# Altium PCB Moo1.1_Ant.PcbDoc
Units mil, origin at the board's own origin, x right, y up, seen from the top; angles counter-clockwise.
Board outline 1229 x 5810 mil, 4 copper layers (Top Layer, GND_Plane, Signal_Layer, Bottom Layer), stack 28.2 mil thick; 69 components, 77 nets, 286 pads, 55 vias.
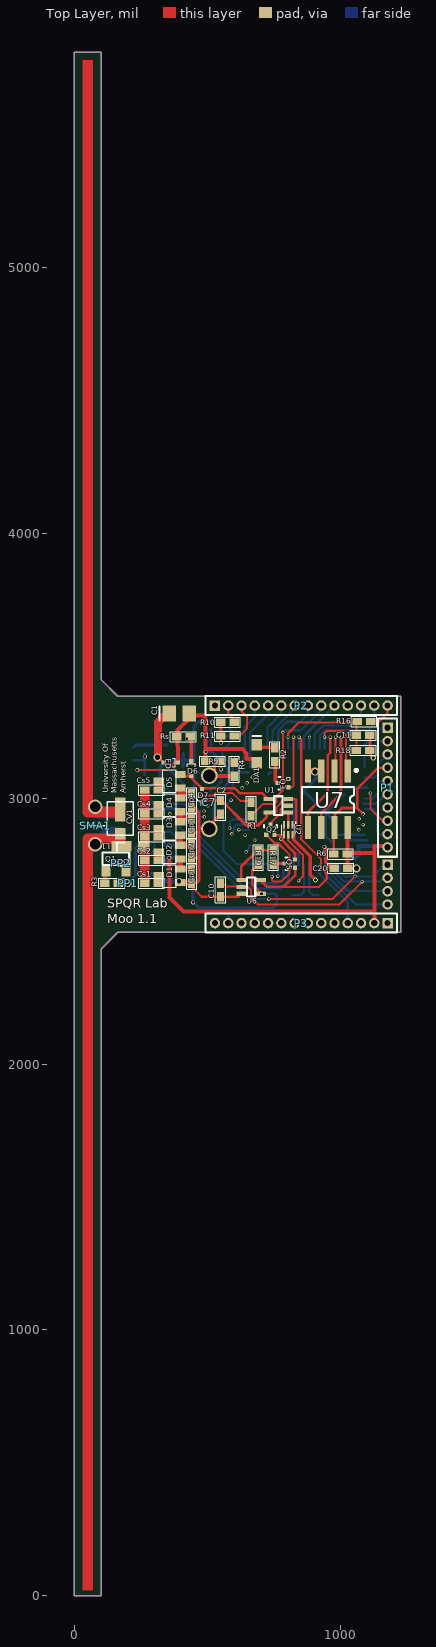
[diagram p0: Top Layer view]
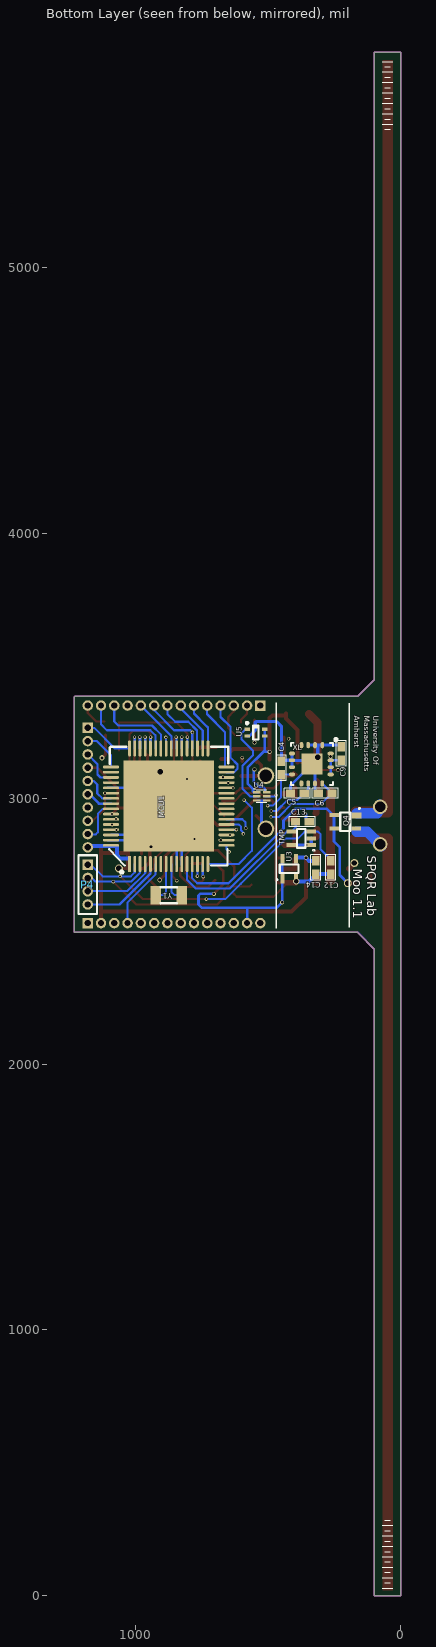
[diagram p1: Bottom Layer view, seen from below]
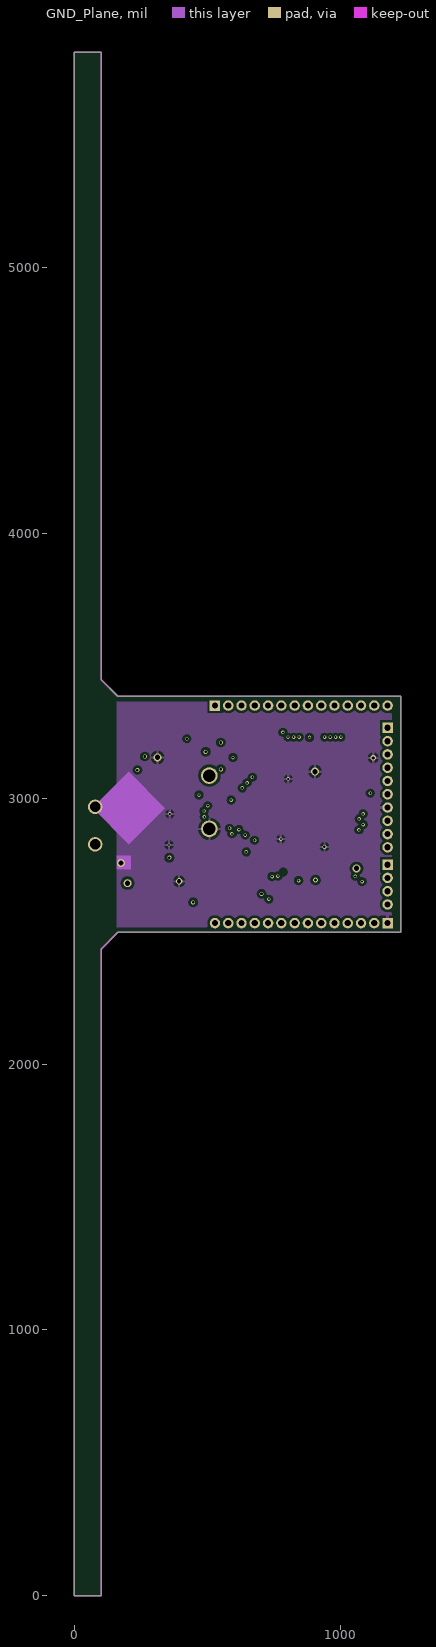
[diagram p2: GND_Plane]
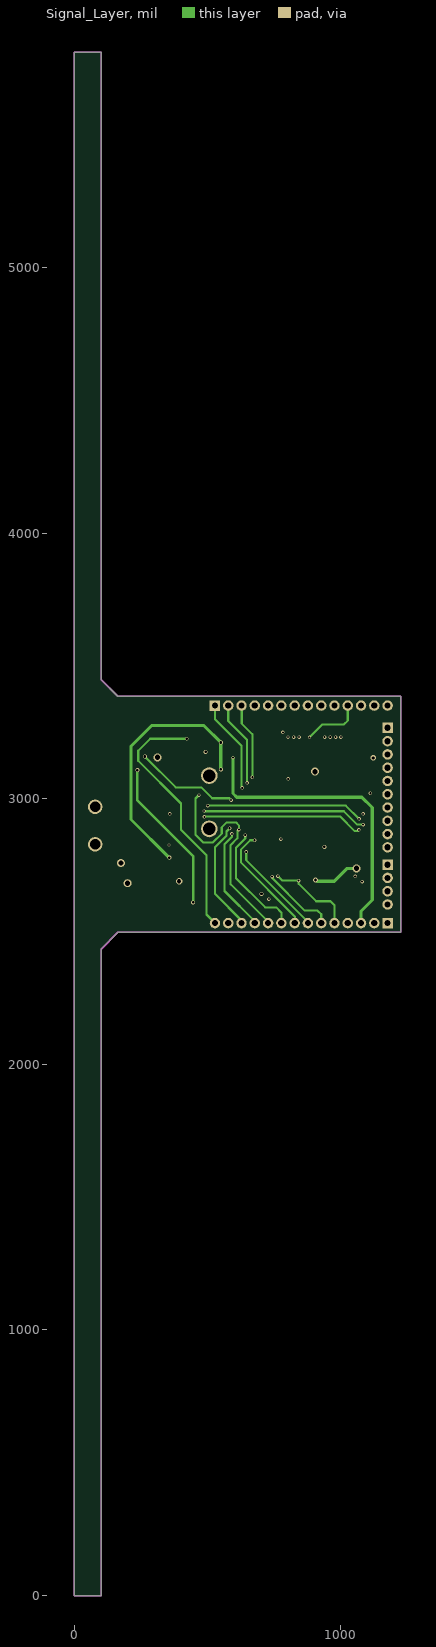
[diagram p3: Signal_Layer]

## Layer stack, top to bottom
Top Layer: signal copper 1.4
Dielectric: prepreg 8.8, FR-4, Dk 4.8
GND_Plane: signal copper 1.4
Dielectric: core 5, FR-4, Dk 4.8
Signal_Layer: signal copper 1.4
Dielectric: prepreg 8.8, FR-4, Dk 4.8
Bottom Layer: signal copper 1.4

## Board outline
0,0 100,0 100,2434 163,2497 1229,2497 1229,3384 1227,3386 163,3386 100,3449 100,5810 0,5810

## Design rules (kind name [scope] priority, off if disabled: settings)
Clearance Clearance_Inner [(OnLayer('GND_Plane') OR OnLayer('Signal_Layer'))] p1: gap=10
Clearance Clearance_Outer [(OnLayer('Bottom Layer') OR OnLayer('Top Layer'))] p2: gap=7
Clearance Clearance_Via_Inner [isVia vs (OnLayer('GND_Plane') OR OnLayer('Signal_Layer'))] p3: gap=10
Clearance Clearance_Via_Outer [isVia vs (OnLayer('Bottom Layer') OR OnLayer('Top Layer'))] p4: gap=7
Clearance Clearance_Via_Via [isVia or isPad vs isVia or isPad] p5: gap=7
Clearance Clearance_Default [All] p6: gap=10
PolygonConnect [All] p1: connectstyle=Relief reliefconductorwidth=10 reliefentries=4 polygonreliefangle="90 Angle"
RoomDefinition Moo_Top [InComponentClass('Moo_Top')] p1: confinementstyle=ConfineIn formatcopy=TRUE lockcomponents=FALSE outline -79,-567 1305,-567 1305,5873 -79,5873
RoomDefinition Sensors [InComponentClass('Sensors')] p2: confinementstyle=ConfineIn formatcopy=TRUE lockcomponents=FALSE outline 1461,2263 -277,2263 -277,3575 1461,3575
RoomDefinition Digital_1 [InComponentClass('Digital_1')] p3: confinementstyle=ConfineIn formatcopy=TRUE lockcomponents=FALSE outline 1575,2186 -416,2186 -416,3668 1575,3668
RoomDefinition AFE [InComponentClass('AFE')] p4: confinementstyle=ConfineIn formatcopy=TRUE lockcomponents=FALSE outline 1396,2385 -142,2385 -142,3509 1396,3509
RoutingVias [All] p1: holewidth=28 width=50 viastyle="Through Hole" minholewidth=28 minwidth=50 maxholewidth=28 maxwidth=50
SilkscreenOverComponentPads [All] p1: minsilkscreentomaskgap=10
SolderMaskExpansion [All] p1: expansion=4
TestPointUsage [All] p1: valid=0 allowmultiple=FALSE
Testpoint [All] p1: side=15 testpointundercomponent=TRUE minsize=40 maxsize=100 preferedsize=60 minholesize=0 maxholesize=40 preferedholesize=32 testpointgrid=1 style=1023 order=0-112345678
Width [All] p1: maxlimit=78 minlimit=5 preferedwidth=8 toplayer_minwidth=6 midlayer1_minwidth=6 midlayer2_minwidth=6 midlayer2_maxwidth=40 bottomlayer_minwidth=6 bottomlayer_maxwidth=40 minimp=50.000000 maximp=50.000000 favimp=50.000000
23 further rules are at their usual default settings.

## Classes and differential pairs
component class Digital_1: C7 C14 C20 MCU1 P1 P2 P3 P4 R1 R4 R5 R6 R10 R11 R12 U3 U4 U5 U7 Y1
component class AFE: C1 C2 Cp1 Cp2 Cp3 Cp4 Cs1 Cs2 Cs3 Cs4 Cs5 CV1 D1 D2 D3 D4 D5 D6 D7 ED L1 PP1 PP2 Q1 Q2 Q4 R3 Rs U1 U2
component class Sensors: C4 C5 C6 C9 C10 C11 C12 C13 DA1 Q3 Q5 R2 R12 R16 R17 R18 R19 TMP U6 U? XL
component class Moo_Top: SMA1

## Components (designator, comment, footprint, x,y, rotation, side; value= is the part's Value field where it differs from the comment)
C1 "Ceramic_Chip_Capacitor" 0805 395,3321 r0 top
C2 "Ceramic_Chip_Capacitor" 0402 550,2968 r270 top
C4 "Ceramic_Chip_Capacitor" 0402 450,3116 r270 bottom
C5 "Ceramic_Chip_Capacitor" 0402 390,3021 r180 bottom
C6 "Ceramic_Chip_Capacitor" 0402 285,3021 r0 bottom
C7 "MaxCap LX 0.1F" "MAXCAP LX 0.1F" 508,2987 r270 top locked
C9 "Ceramic_Chip_Capacitor" 0402 224,3170 r270 bottom
C10 "Ceramic_Chip_Capacitor" 0402 550,2657 r270 top
C11 "Ceramic_Chip_Capacitor" 0402 1087,3239 r0 top
C12 "Ceramic_Chip_Capacitor" 0402 264,2741 r90 bottom
C13 "Ceramic_Chip_Capacitor" 0402 371,2914 r0 bottom
C14 "Ceramic_Chip_Capacitor" 0402 320,2741 r90 bottom
C20 "Ceramic_Chip_Capacitor" 0402 1003,2738 r180 top
Cp1 "Ceramic_Chip_Capacitor" 0402 441,2708 r270 top
Cp2 "Ceramic_Chip_Capacitor" 0402 441,2803 r270 top
Cp3 "Ceramic_Chip_Capacitor" 0402 441,2898 r270 top
Cp4 "Ceramic_Chip_Capacitor" 0402 441,2993 r270 top
Cs1 "Ceramic_Chip_Capacitor" 0402 290,2682 r0 top
Cs2 "Ceramic_Chip_Capacitor" 0402 290,2768 r0 top
Cs3 "Ceramic_Chip_Capacitor" 0402 290,2857 r0 top
Cs4 "Ceramic_Chip_Capacitor" 0402 290,2944 r0 top
Cs5 "Ceramic_Chip_Capacitor" 0402 290,3033 r0 top
CV1 "Var Cap" VAR-CAP_603 173,2926 r90 top
D1 "HSMS-285C" "SOT-323, HSMS-285C" 358,2710 r90 top
D2 "HSMS-285C" "SOT-323, HSMS-285C" 358,2799 r90 top
D3 "HSMS-285C" "SOT-323, HSMS-285C" 358,2888 r90 top
D4 "HSMS-285C" "SOT-323, HSMS-285C" 358,2977 r90 top
D5 "HSMS-285C" "SOT-323, HSMS-285C" 358,3066 r90 top
D6 "RB751S40T1" SOD-523 440,3141.12 r0 top
D7 "RB751S40T1" SOD-523 480,2982 r180 top
DA1 "SML-311UTT86" LED-0603 687,3170 r270 top
ED "ESD5Z3.3T1" SOD-523 390,3136 r270 top
L1 "Inductor" 0603 227,2821 r0 top
MCU1 "MSP430F261x" 64-PM 874,2972 r90 bottom
P1 "MHDR1X10" MHDR1X10 1179,3267 r270 top
P2 "MHDR1X14" MHDR1X14#1 529,3351 r0 top
P3 "MHDR1X14" MHDR1X14#2 529,2532 r0 top
P4 "MHDR1X4" MHDR1X4 1179,2752 r270 bottom
PP1 "Probe Point" "PROBE POINT" 200,2682 r90 top
PP2 "Probe Point" "Probe Point" 175,2758 r0 top
Q1 "BFT25A" SOT-23 156,2774 r0 top
Q2 "NTK3134N" SOT723 738,2884 r90 top
Q3 "NTK3134N" SOT723 785,3059 r180 top
Q4 "BF1212WR" SOT343R 207,2914 r90 bottom
Q5 "NTK3134N" SOT723 811,2756 r180 top
R1 "Thick Film Chip Resistor" 0402 665,2961 r270 top
R2 "Thick Film Chip Resistor" 0402 754,3166 r270 top
R3 "Thick Film Chip Resistor" 0402 140,2682 r0 top
R4 "Thick Film Chip Resistor" 0402 602,3111 r90 top
R5 "Thick Film Chip Resistor" 0402 520,3141 r180 top
R6 "Thick Film Chip Resistor" 0402 1002,2792 r180 top
R10 "Thick Film Chip Resistor" 0402 576,3288 r0 top
R11 "Thick Film Chip Resistor" 0402 576,3236 r0 top
R16 "Thick Film Chip Resistor" 0402 1090,3291 r180 top
R17 "Thick Film Chip Resistor" 0402 748,2779 r270 top
R18 "Thick Film Chip Resistor" 0402 1087,3182 r0 top
R19 "Thick Film Chip Resistor" 0402 692,2779 r90 top
Rs "Thick Film Chip Resistor" 0402 410,3233 r0 top
SMA1 "SMA Port" "SMA Port" 78,2899 r180 top
TMP "LM94021" SC70 375,2851 r90 bottom
U1 "NCS2200SQ2T2G" sc70-5 768,2974 r90 top
U2 "NLSV1T244" UDFN6 805,2883 r180 top
U3 "NCP583" SC82-AB 394,2732 r180 bottom
U4 "NLSV1T244" UDFN6 524,3009 r270 bottom
U5 "S-1000C20-I4T1G" SNT-4A 579,3262 r180 bottom
U6 "TS5A3166" sc70-5 665,2668 r270 top
U7 "SST25WF040" SOIC8 954,2997 r270 top
XL "ADXL330" 16-QFN 335,3131 r270 bottom
Y1 "FC-135" FC-135 874,2637 r0 bottom

## Footprints (in the part's own frame and the unit in brackets; to place one, negate y for a bottom-side part, rotate by r counter-clockwise, add the part's x,y. Pads: shape width x height; smd on the part's side, far side on the other; paste and mask are expansions set on the pad)
16-QFN [mm] "16-QFN, LFCSP (CP-16-5) for ADXL330k"
  rect 2x2 smd: 0(0,0)
  oval 0.6x0.35 smd: 1(-1.8,1) 2(-1.8,0.3) 3(-1.8,-0.35) 4(-1.8,-1) 9(1.867,-1) 10(1.867,-0.35) 11(1.867,0.3) 12(1.867,1)
  oval 0.35x0.6 smd: 5(-1,-1.9) 6(-0.35,-1.9) 7(0.3,-1.9) 8(1,-1.9) 13(1,1.8) 14(0.3,1.8) 15(-0.35,1.8) 16(-1,1.8)
  silkscreen extent -2.45,-2 2,2.42
64-PM [mm] "S-PQFP, 64-Leads, Body 12.2x12.2mm (max), Pitch 0.50mm, IPC Low Density - MSP430x261x"
  rect 8.7x8.7 smd: 0(0,0)
  rect 1.55x0.25 smd: 1(-5.525,3.75)
  oval 1.55x0.25 smd: 2(-5.525,3.25) 3(-5.525,2.75) 4(-5.525,2.25) 5(-5.525,1.75) 6(-5.525,1.25) 7(-5.525,0.75) 8(-5.525,0.25) 9(-5.525,-0.25) 10(-5.525,-0.75) 11(-5.525,-1.25) 12(-5.525,-1.75) 13(-5.525,-2.25) 14(-5.525,-2.75) 15(-5.525,-3.25) 16(-5.525,-3.75) 33(5.525,-3.75) 34(5.525,-3.25) 35(5.525,-2.75) 36(5.525,-2.25) 37(5.525,-1.75) 38(5.525,-1.25) 39(5.525,-0.75) 40(5.525,-0.25) 41(5.525,0.25) 42(5.525,0.75) 43(5.525,1.25) 44(5.525,1.75) 45(5.525,2.25) 46(5.525,2.75) 47(5.525,3.25) 48(5.525,3.75)
  oval 0.25x1.55 smd: 17(-3.75,-5.525) 18(-3.25,-5.525) 19(-2.75,-5.525) 20(-2.25,-5.525) 21(-1.75,-5.525) 22(-1.25,-5.525) 23(-0.75,-5.525) 24(-0.25,-5.525) 25(0.25,-5.525) 26(0.75,-5.525) 27(1.25,-5.525) 28(1.75,-5.525) 29(2.25,-5.525) 30(2.75,-5.525) 31(3.25,-5.525) 32(3.75,-5.525) 49(3.75,5.525) 50(3.25,5.525) 51(2.75,5.525) 52(2.25,5.525) 53(1.75,5.525) 54(1.25,5.525) 55(0.75,5.525) 56(0.25,5.525) 57(-0.25,5.525) 58(-0.75,5.525) 59(-1.25,5.525) 60(-1.75,5.525) 61(-2.25,5.525) 62(-2.75,5.525) 63(-3.25,5.525) 64(-3.75,5.525)
  silkscreen extent -6.42,-5.69 5.69,5.69
0402 [mm] "Chip Capacitor; Body 1.0 x 0.5 mm (LxW typ)"
  rect 0.9x0.7 smd: 1(-0.65,0) 2(0.65,0)
  silkscreen extent -1.23,-0.48 1.23,0.48
0603 [mm] "Chip Capacitor; Body 1.6 x 0.8 mm (LxW typ)"
  rect 1.1x1 smd: 1(-0.85,0) 2(0.85,0)
  silkscreen extent -1.7,-0.4 -1.7,0.4
0805 [mm] "Chip Capacitor; Body 2.0 x 1.2 mm (LxW typ)"
  rect 1.3x1.5 smd: 1(-0.95,0) 2(0.95,0)
  silkscreen extent -1.9,-0.65 -1.9,0.65
FC-135 [mm] "FC-135   crystal - epson eletronics"
  rect 1x1.8 smd: 1(-1.25,0) 2(1.25,0)
  silkscreen extent -0.76,-0.76 0.76,0.76
LED-0603 [mm] "LED SML-311UTT86"
  rect 1.1x1 smd: 1(0.85,0) 2(-0.85,0)
  silkscreen extent -1.7,-0.4 -1.7,0.4
"MAXCAP LX 0.1F" [mm] "Maxcap LX Series, 0.1F, Diameter  11mm, Leads 5.1mm"
  round 1.6 hole 1.2: 1(-2.55,0) 2(2.55,0)
MHDR1X4 [mm] "Connector; Header; 4 Position"
  rect 1x1 hole 0.6: 1(0,0)
  round 1 hole 0.6: 2(1.27,0) 3(2.54,0) 4(3.81,0)
  silkscreen extent -0.9,-0.9 4.71,0.9
MHDR1X10 [mm] "Connector; Header; 10 Position"
  rect 1x1 hole 0.6: 1(0,0)
  round 1 hole 0.6: 2(1.27,0) 3(2.54,0) 4(3.81,0) 5(5.08,0) 6(6.35,0) 7(7.62,0) 8(8.89,0) 9(10.16,0) 10(11.43,0)
  silkscreen extent -0.9,-0.9 12.33,0.9
MHDR1X14#1 [mm] "Connector; Header; 14 Position"
  rect 1x1 hole 0.6: 1(0,0)
  round 1 hole 0.6: 2(1.27,0) 3(2.54,0) 4(3.81,0) 5(5.08,0) 6(6.35,0) 7(7.62,0) 8(8.89,0) 9(10.16,0) 10(11.43,0) 11(12.7,0) 12(13.97,0) 13(15.24,0) 14(16.51,0)
  silkscreen extent -0.9,-0.9 17.41,0.9
MHDR1X14#2 [mm] "Connector; Header; 14 Position"
  round 1 hole 0.6: 1(0,0) 2(1.27,0) 3(2.54,0) 4(3.81,0) 5(5.08,0) 6(6.35,0) 7(7.62,0) 8(8.89,0) 9(10.16,0) 10(11.43,0) 11(12.7,0) 12(13.97,0) 13(15.24,0)
  rect 1x1 hole 0.6: 14(16.51,0)
  silkscreen extent -0.9,-0.9 17.41,0.9
"PROBE POINT" [mil] "35mil Pad, 20mil hole size"
  round 30 hole 20: 0(0,0)
"Probe Point" [mil] "35mil Pad, 20mil hole size"
  round 30 hole 20: 0(0,0)
SC70 [mm] "Ultra low Power LDO - TI"
  rect 0.4x0.92 smd: 1(-0.65,-0.95) 2(0,-0.95) 3(0.65,-0.95) 4(0.65,0.95) 5(-0.65,0.95)
  silkscreen extent -1.25,-1.3 0.9,0.4
sc70-5 [mm] "SC70-5"
  rect 0.4x0.92 smd: 1(-0.65,-0.95) 2(0,-0.95) 3(0.65,-0.95) 4(0.65,0.95) 5(-0.65,0.95)
  silkscreen extent -0.9,-0.4 0.9,0.4
SC82-AB [mm]
  rect 0.4x0.92 smd: 1(-1.323,-0.823) 2(-0.023,-0.823) 3(-0.023,1.077) 4(-1.323,1.077)
  silkscreen extent -1.86,-0.92 0.23,0.53
"SMA Port" [mil] "SMA port for wisp"
  round 55 hole 40: 1(0,70.71) 2(0,-70.71)
  silkscreen extent -40,0 40,0
SNT-4A [mm]
  rect 0.52x0.3 smd: 1(0,0) 2(0,-0.65) 3(1.68,-0.65) 4(1.68,0)
  silkscreen extent -0.09,-0.98 1.09,0.67
SOD-523 [mm] "SOD-523 Footprint"
  rect 0.4x0.4 smd: 1(0,0) 2(0,-1.4)
  silkscreen extent -0.4,-0.53 0.4,-0.25
SOIC8 [mm] "8-Lead SOIC"
  rect 2.2x0.6 smd: 1(-2.709,1.918) 2(-2.709,0.648) 3(-2.709,-0.622) 4(-2.709,-1.892) 5(2.671,-1.892) 6(2.671,-0.622) 7(2.671,0.648) 8(2.671,1.918)
  silkscreen extent -2.92,-2.49 1.22,2.84
SOT343R [mm] "SOT343R Package for BF1212"
  rect 0.6x0.92 smd: 1(0.584,-1.016)
  rect 0.4x0.92 smd: 2(-0.664,-1.007) 3(-0.664,1.093) 3(0.636,1.093)
  silkscreen extent -0.91,-1.3 1.27,0.54
SOT723 [mm] "SOT723, 3-Leads, Body 1.3x1.3mm (max), Pitch 0.40mm, IPC Medium Density"
  rect 0.4x0.4 smd: 1(-0.5,0.4) 2(-0.5,-0.4) 3(0.5,0)
  silkscreen extent 0.23,-0.6 0.43,0.6
SOT-23 [mm] "SOT-23; 3 Leads; Body 3.0 x 2.5 mm, inc. leads (LxW max)"
  rect 0.85x1 smd: 1(-0.95,-1.2) 2(0.95,-1.2) 3(0,1.2)
  silkscreen extent -1.27,-0.58 1.28,0.58
"SOT-323, HSMS-285C" [mm] "SOT-323/SC-70; 3 Leads; HSMS-285C"
  rect 0.7x1 smd: 1(-0.65,-1.025) 2(0.65,-1.025) 3(0,1.025)
  silkscreen extent -1.07,-0.65 1.07,0.65
UDFN6 [mm] "UDFN6 - Level Shifter -  NLSV1T244"
  rect 0.22x0.7 smd: 1(-0.4,-0.477) 2(0,-0.477) 3(0.4,-0.477) 4(0.4,0.477) 5(0,0.477) 6(-0.4,0.477)
  silkscreen extent -0.76,-0.74 0.6,0.5
VAR-CAP_603 [mm] "Var-Cap 603 Compatible, DK: 490-2009 & SG2026CT"
  rect 1.1x1 smd: 1(-1.45,0)
  rect 2.3x1 smd: 2(0.85,0)
  silkscreen extent -2.3,-1.25 1.6,1.25

## Part data
C1 C2 C4 C5 C6 C9 C10 C11 C12 C13 C14 C20 Cp1 Cp2 Cp3 Cp4 Cs1 Cs2 Cs3 Cs4 Cs5: "Ceramic Capacitor - Standard"
C7: "MaxCap LX 0.1F, low leakage supper cap 5.5v"
CV1: library part Var-Cap/603, "Var-Cap 603 Compatible, DK: 490-2009 & SG2026CT"
D1 D2 D3 D4 D5: "Agilent Schottky Diode, Bridge Quad, HSMS-285C"
D6: library part HSMS-285C, "Agilent Schottky Diode, Bridge Quad, HSMS-285C"
D7: library part "Schottky Diode", "Schottky Diode"
ED: "5V Overvoltage Protection Zener"
MCU1: library part MSP430x261x, "64PM MSP430F261x"
P4: library part MHDR1X3, "Header, 3-Pin"
PP1: "Probe Point for debug"
Q1: "NPN 5 GHz Wideband Transistor"
Q2 Q3 Q5: "Powe Mosfet 20V, 890mA, Single N-channel"
Q4: library part BF1212
SMA1: "Two pin SMA connector wisp"
TMP: "Temperature Sensor"
U1: "On Semi 10uA Comparator"
U2 U4: "Level Shifter: 1-Bit Dual-Supply Non-Inverting Level Translator"
U3: "Ultra-Low Iq 150mA CMOS LDO Regulator with Enable"
U5: library part S1000C30-N4T, "Ultra-small package High precision protection(SC82-AB)"
U6: "TI Analog Switch 100nA 1ohm Normally Open"
XL: library part ADXL330k, "Analog Devices 3D Accelerometer"
Y1: library part MC-146, "FC-135 Crystal D-K SE2416CT (MC-146)"

## Via types
v1: diameter 13, hole 8, Top Layer to Bottom Layer, tented both sides, 40 vias
v2: diameter 15, hole 10, Top Layer to Bottom Layer, tented both sides, 9 vias
v3: diameter 30, hole 20, Top Layer to Bottom Layer, tented both sides, 2 vias
v4: diameter 18, hole 12, Top Layer to Bottom Layer, tented both sides, 1 vias
v5: diameter 30, hole 20, Top Layer to Bottom Layer, 1 vias
v6: diameter 24, hole 16, Top Layer to Bottom Layer, tented both sides, 1 vias
v7: diameter 20, hole 12, Top Layer to Bottom Layer, tented both sides, 1 vias

## Nets (pads, with @x,y where several pads share a name; then routed paths per layer and width w, separated by ;. In a path a pad name is that pad's centre, name@x,y a point inside that pad or via, vN(x,y) a via of type N, cw(c..) or ccw(c..) an arc to the next point about the centre after c; other vN are vias at no path point)
ANT: CV1.1 L1.1 Q1.3 Q4.2 SMA1.1 | length 257.4
  Top Layer w40: 49.54,2850 CV1.1@173,2850 ; SMA1.1@79,2833 SMA1.1@92,2846
  Bottom Layer w40: SMA1.1@75,2821 75,2824 127,2876 166,2876
"BIT PWR": C2.1 D7.1 U1.3 U1.5 U2.1 | length 570.2
  Top Layer w8: U1.5 757.41,2948.41 761.29,2952.29 761.29,2967.53 776.29,2982.53 776.29,2986.43 782.74,2992.87 798.68,2992.87 U1.3 806.99,2998 834,2998 835,2997 835,2906 830.8,2901.8 U2.1
  Top Layer w12: D7.1@480,2981 480,2988 487,2995 525,2995 C2.1@550,2995 ; C2.1@548,3001.59 548,2999 647,2900 692,2900 723,2931 U1.5@723,2945
BITLINE: D5.2 D6.2 D7.2 U1.4 | length 395
  Top Layer w10: D5.2@406.41,3091.59 D5.2 403.94,3086 D6.2@443,3086 ; D6.2@440,3085 440,3079 480,3039 604,3039 622,3021 706,3021 U1.4@726,3001
  Top Layer w12: D5.2@393.41,3091.59 D5.2 ; D5.2@399,3094 D5.2@404,3099 ; D5.2@399.76,3093 D5.2 ; D5.2@400,3091.59 D5.2
CAPSENSE: C11.1 MCU1.37 R16.2 R18.1 | length 437.2
  Top Layer w8: v1(804,3232) 804,3246 845.59,3287.59 1061.41,3287.59 R18.1
  Bottom Layer w8: v1(804,3232) 804,3190.62 MCU1.37
CAPSENSELINE: P2.14 R16.1 | length 104.7
  Top Layer w8: R16.1 1147,3291 1179,3323 P2.14
CE#: MCU1.44 U7.1 | length 287.3
  Top Layer w8: v1(942,3232) 942,3247 950,3255 1010,3255 1022,3243 1022,3111.14 U7.1
  Bottom Layer w10: MCU1.44 v1@942.9,3231.1
CLK_A: MCU1.28 P2.1 | length 352.7
  Signal_Layer w8: P2.1 529,3300 629,3200 629,3044 v1(632,3041)
CLK_B: MCU1.31 P2.4 | length 310.4
  Bottom Layer w8: MCU1.31 656.43,3100 628.01,3100 614.97,3113.04 614.97,3128.97 641,3155 641,3270 679,3308 P2.4@679,3350
COMPA: U1.1 U2.2 | length 46.2
  Top Layer w8: U2.2 U1.1@805,2948.01
COMPFOOT: Q2.3 U1.2 | length 107.6
  Top Layer w8: Q2.3 738,2907.83 763.58,2933.41 776.29,2946.08 776.29,2960.84 789.45,2974 U1.2
CONTROL: Q1.1 R3.1 | length 35.4
  Top Layer w15: R3.1 Q1.1@114.41,2717.41
CURRENT_SENSOR: D6.1 P3.1 Rs.2 | length 1061.8
  Top Layer w12: D6.1@439.59,3141.53 Rs.2@439.59,3233
  Signal_Layer w8: v1(423,3226) 285,3226 240,3181 240,3143 401,2982 401,2883 497,2787 497,2564 P3.1
FEEDER: Cs1.1 Cs2.1 Cs3.1 Cs4.1 Cs5.1 L1.2 | length 336.4
  Top Layer w35.43: Cs1.1@265,2690.59 Cs5.1@265,3027
GND: C1.1 C2.2 C4.1 C5.1 C6.2 C7.2 C9.1 C10.2 C11.2 C12.1 C13.1 C14.1 C20.2 Cp1.2 Cp2.2 Cp3.2 Cp4.2 CV1.2 D1.1 ED.2 MCU1.0 MCU1.10 MCU1.11 MCU1.53 MCU1.62 MCU1.63 P1.7 P3.14 PP2.0 Q1.2 Q2.2 Q3.2 Q4.1 Q5.2 R18.2 SMA1.2 TMP.1 TMP.2 TMP.5 U2.3 U2.4 U3.2 U4.3 U4.4 U5.2 U6.3 U7.3 U7.4 XL.0 XL.1 XL.2 XL.3 XL.5 XL.6 XL.7 XL.11 | length 3907.7
  Top Layer w8: Cp1.2@438,2672 479,2631 618,2631 U6.3@632,2645 ; C7.2@512,2876 C7.2@516,2872 ; C7.2@521,2878 C7.2@521,2880 ; Q2.2@753.86,2864.2 U2.4 U2.3
  Top Layer w10: v5@321,3151 334.88,3137.12 ED.2 ; v1(777,2848) 830.68,2794.32 Q5.2
  Top Layer w12: Cp1.2 459.41,2682.41 469,2692 469,2948 450,2967 441.41,2967 Cp4.2 ; Cp2.2 468.59,2777.41 ; Cp3.2 468.59,2872.41 469,2872 ; 472,2889.41 C7.2@499.59,2889.41 ; C7.2@523,2898 523,2914 C2.2@545,2936 ; Q2.2 Q2.2@753.86,2864.2 ; v1(777,2848) 777,2860 ; v2(941,2819) 945.69,2814.31 945.69,2760.31 968,2738 C20.2 ; C11.2 R18.2 1112.59,3166.41 v7(1125,3154)
  Top Layer w20: PP2.0@174,2759 174,2758 Q1.2@196,2736 ; PP2.0@176,2756 PP2.0@176,2760 ; D1.1@396.35,2684 Cp1.2@437,2684
  Top Layer w24: U7.4 U7.3
  Top Layer w30: v5@314,3156 314,3287 C1.1@346,3319
  Top Layer w40: 49.53,2950 CV1.2@170,2950
  Bottom Layer w8: C7.2@508,2905 C7.2@510,2907 ; U4.4@509,2993 U4.3@541,2993
  Bottom Layer w10: XL.0 415.59,3050.41 C5.1 ; C7.2@523,2886 525,2888 525,2991 ; MCU1.11@825,2752 MCU1.0@825,2805.99 ; MCU1.10@844,2752 MCU1.0@844,2805.52 ; MCU1.0@967,2839 946,2860 946,2947 MCU1.0@1015,3016 ; MCU1.0@981.75,2864 MCU1.62@1091,2864 ; MCU1.0@1018,3041 MCU1.53@1103,3041 ; MCU1.0@1035,2844 MCU1.63@1102.95,2844
  Bottom Layer w12: C9.1 230.28,3201.87 XL.2 ; C6.2 323.19,3033.6 323.19,3119.19 XL.0 ; XL.0@313,3153 313,3200 325,3200 325,3201.87 XL.3 ; TMP.2 TMP.1 355.41,2825.41 v1(356,2826) 411.81,2826 TMP.5 ; XL.0@352,3144 XL.6@409.8,3144 ; C13.1@357,2925 357,2941 v1(359,2943) ; XL.7 XL.5 ; XL.6 446.81,3144.78 C4.1 450,3273 468,3291 546,3291 548,3289 548,3258.47 570.06,3236.41 U5.2 ; MCU1.0@731,3093 MCU1.0@738,3100 ; MCU1.0@827,2860 MCU1.0@827,2994 ; MCU1.0@924.9,3091.9 856,3023 870,3023 MCU1.0@978.27,2914.73
  Bottom Layer w15: C12.1@264,2716 C14.1@312,2716 ; C14.1 346.41,2689 U3.2@398,2689
  Bottom Layer w40: SMA1.2@80,2977 80,2959 89,2945 Q4.1@165,2945
  other v1: 805,3075
  other v3: 906,3102
  other v5: 313,3156
  other v6: 394,2689
LED1: DA1.2 R2.1 | length 60.5
  Top Layer w15: DA1.2@696.46,3194 753.59,3194 R2.1@756,3191.59
LED2: Q3.3 R2.2 | length 85.3
  Top Layer w15: R2.2@756,3140.41 756,3068.31 Q3.3
LED_CTL_1: MCU1.38 Q3.1 | length 246
  Top Layer w8: Q3.1@806.68,3043.25 819.25,3043.25 825,3049 v1(825,3232)
  Bottom Layer w8: MCU1.38@825,3189.73 v1(825,3232)
MAXCAP: C7.1 R4.1 R5.1 | length 165.4
  Top Layer w12: C7.1@509,3106 C7.1@513,3106 ; C7.1@526,3099 526,3126 R5.1@543,3143 ; R5.1@543,3138 R5.1@543,3146 ; R5.1@544,3137 R5.1@544,3138 ; R5.1@544,3141 R5.1@544,3146
  Top Layer w15: C7.1@527,3086 R4.1@600,3086
  Bottom Layer w8: C7.1@510,3099 C7.1@533.31,3099
MCLK: MCU1.48 P1.1 | length 189.5
  Bottom Layer w8: MCU1.48 1077.52,3189.52 1155,3267 P1.1
NetCs1_2: Cs1.2 D1.3 | length 28
  Top Layer w25: Cs1.2@315,2682 D1.3@315,2710
NetCs2_2: Cs2.2 D2.3 | length 29.4
  Top Layer w25: D2.3@316,2796 317,2795 Cs2.2@317,2767
NetCs3_2: Cs3.2 D3.3 | length 27.8
  Top Layer w25: D3.3@315,2885 317,2883 Cs3.2@317,2858
NetCs4_2: Cs4.2 D4.3 | length 27.8
  Top Layer w25: D4.3@318,2973 318,2948 Cs4.2@320,2946
NetCs5_2: Cs5.2 D5.3 | length 28.4
  Top Layer w25: Cs5.2@316,3037 317,3038 D5.3@317,3065
NetQ5_3: Q5.3 R17.2 | length 36.4
  Top Layer w12: R17.2@750.59,2756 Q5.3@787,2756
P15: MCU1.17 P3.8 | length 394.5
  Signal_Layer w8: v1(647,2800) 647,2769 P3.8@878.5,2537.5
  Bottom Layer w8: v1(647,2800) 656.48,2809.48 MCU1.17 ; MCU1.17@655.12,2823 655.12,2823.24 656.88,2825 MCU1.17@662,2825
P16: MCU1.18 P3.7 | length 428
  Signal_Layer w8: v1(678,2844) 662.01,2844 626.5,2808.49 626.5,2760.5 830,2557 P3.7@830,2531
P17: MCU1.19 P3.6 | length 441.5
  Signal_Layer w8: v1(643,2863) 643,2850.45 608.5,2815.95 608.5,2700.5 718,2591 760,2591 779,2572 P3.6@779,2531
P21: MCU1.21 P3.4 | length 482
  Signal_Layer w8: v1(593,2868) 593,2856.35 565,2828.35 565,2653 P3.4@683,2535
  Bottom Layer w8: v1(593,2868) 593,2872.25 601.5,2880.75 601.5,2894.5 610.1,2903.1 MCU1.21
P22: MCU1.22 P3.3 | length 512.4
  Signal_Layer w8: v1(584,2889) 584,2887.99 572.5,2876.49 572.5,2861.31 529,2817.81 529,2642 P3.3@631,2540
  Bottom Layer w8: v1@585,2889 585,2911 596.79,2922.79 MCU1.22
P36: MCU1.34 P2.7 | length 195.8
  Bottom Layer w8: MCU1.34 746.05,3257.05 829,3340 P2.7
P37: MCU1.35 P2.8 | length 237.5
  Bottom Layer w8: MCU1.35 767.5,3191.29 767.5,3257.25 800.25,3290 850,3290 879,3319 P2.8
P40: MCU1.36 P2.9 R1.2 | length 646.3
  Top Layer w8: R1.2 710.31,2980.72 753.26,2980.72 759.71,2987.16 759.71,3006.71 785,3032 v1(785,3250)
  Bottom Layer w8: v1(785,3250) 793,3258 854,3258 929,3333 P2.9 ; MCU1.36 v1@785.42,3250
P44: MCU1.40 P2.10 | length 209
  Bottom Layer w8: MCU1.40 864.16,3236.16 P2.10
P45: MCU1.41 P2.11 | length 269.1
  Signal_Layer w8: v1(885,3231) 934,3280 1015,3280 1029,3294 P2.11
  Bottom Layer w8: MCU1.41 883.84,3229.84 v1(885,3231)
P46: MCU1.42 P2.12 | length 308.6
  Bottom Layer w8: MCU1.42 903.53,3242.53 937,3276 1064,3276 1079,3291 P2.12
P47: MCU1.43 P2.13 | length 342.6
  Bottom Layer w8: MCU1.43 924.5,3190.81 924.5,3239.25 943.25,3258 1107,3258 1129,3280 P2.13
P63_A3: C12.2 MCU1.2 P4.1 TMP.3 | length 1241.2
  Top Layer w8: v1(732,2622) 971,2622 v1(1057,2708)
  Bottom Layer w8: C12.2@266,2773 302,2809 302,2866 312.59,2876.59 TMP.3 338.19,2876 362,2876 388,2850 433,2850 603,2680 661,2622 v1(732,2622) ; MCU1.2 1002,2754.43 1002,2723.13 1017.13,2708 v1(1057,2708) 1123,2708 1167,2752 P4.1
P64_A4: C10.1 MCU1.3 P4.2 U6.2 | length 852.7
  Top Layer w8: C10.1@562,2677 569,2670 651.55,2670 665,2656.55 665,2628 691,2602 997,2602 v1(1083,2688)
  Bottom Layer w8: MCU1.3 982.27,2721.65 1015.92,2688 v1(1083,2688) 1150,2688 1164,2702 P4.2@1178,2702
P65_A5: MCU1.4 P4.3 | length 284.4
  Bottom Layer w8: MCU1.4 962.58,2720.12 1029.7,2653 1165,2653 P4.3@1179,2667
P66_A6: MCU1.5 P4.4 | length 326.5
  Bottom Layer w8: MCU1.5 942.9,2718.59 1059.49,2602 1164,2602 P4.4@1179,2617
P67_A7: MCU1.6 P3.11 | length 266.3
  Bottom Layer w8: MCU1.6 923.21,2715.79 1029,2610 P3.11
RECEIVE: MCU1.14 P3.10 U2.5 | length 581.2
  Top Layer w8: U2.5 805,2842.63 861,2786.63 861,2709 v1(844,2692)
  Signal_Layer w8: v1(766,2709) 783,2692 v1(844,2692) 844,2680 910,2614 964,2614 979,2599 P3.10@979,2531
  Bottom Layer w8: v1(766,2709) MCU1.14@766,2754.21
RECEIVE_ENABLE: MCU1.15 P3.9 Q2.1 | length 611.1
  Top Layer w8: Q2.1 753.26,2833.31 766.34,2833.31 810.19,2789.45 810.19,2719.19 779,2688 750,2688 744,2694 v1@744,2706.25
  Signal_Layer w8: v1(744,2707) 744,2702 867,2579 915,2579 929,2565 P3.9
  Bottom Layer w8: v1(744,2707) 746.05,2709.05 MCU1.15
RST: MCU1.58 P1.4 R6.2 U7.7 | length 549.7
  Top Layer w10: R6.2 U7.7@976.41,2888.77 ; U7.7 979.5,2938.5 1006.5,2965.5 ; v1@1088,2942 1064.5,2965.5 1006.5,2965.5 ; P1.4 1144,3117 1065,3038 1065,2967 1063.5,2965.5 1006.5,2965.5
  other v1: 1087,2943
RX_SOMI_A: MCU1.33 P2.6 | length 183.3
  Bottom Layer w8: MCU1.33 726.36,3268.36 736,3278 779,3321 P2.6
SCAPCHARGE: P3.12 R4.2 | length 1147.8
  Top Layer w12: R4.2@597,3141.59 v1(597,3155)
  Signal_Layer w12: v1(597,3155) 597,3020 611,3006 1082,3006 1121,2967 1121,2619 1079,2577 P3.12@1079,2531
SCK: MCU1.47 U7.6 | length 413.3
  Top Layer w10: U7.6 929.5,2946.5 1003.31,3020.31 v1@1003.31,3231.69
  Bottom Layer w10: MCU1.47 1001.95,3230.95 v1(1003,3232)
SCL_B: MCU1.30 P2.3 R11.2 | length 441.1
  Top Layer w8: R11.2 620,3236 650,3266 650,3308 629,3329 P2.3
  Signal_Layer w8: P2.3@630,3351 630,3283 670,3243 v1(670,3081)
SDA_B: MCU1.29 P2.2 R10.2 | length 393.5
  Top Layer w8: P2.2 579,3321 601.59,3298.41 R10.2
  Signal_Layer w8: P2.2 579,3293 649.5,3222.5 649.5,3060.5 v1(650,3060) ; v1@650.5,3060.5 v1@651,3060
SIMO: MCU1.45 U7.5 | length 417.4
  Top Layer w10: U7.5 879.5,2949.5 954,3024 954,3164 963,3173 v1(963,3232)
  Bottom Layer w10: MCU1.45 962.58,3231.58 v1(963,3232)
SMCLK: MCU1.49 P1.2 | length 153.9
  Bottom Layer w8: MCU1.49 1091.52,3163.52 1146,3218 P1.2@1179,3218
SOMI: MCU1.46 U7.2 | length 172.6
  Top Layer w8: U7.2 983,3107.14 v1(983,3232)
  Bottom Layer w10: MCU1.46 982.27,3231.27 v1(983,3232)
STAGE1: Cp1.1 D1.2 D2.1 | length 81.3
  Top Layer w20: D2.1 D1.2 439,2735.59 Cp1.1
STAGE2: Cp2.1 D2.2 D3.1 | length 82.1
  Top Layer w20: D3.1 D2.2 437,2824.59 Cp2.1
STAGE3: Cp3.1 D3.2 D4.1 | length 84.6
  Top Layer w20: D4.1 D3.2 408.35,2923.59 Cp3.1
STAGE4: Cp4.1 D4.2 D5.1 | length 87.1
  Top Layer w20: D5.1 D4.2 414.35,3018.59 Cp4.1
SV_IN: MCU1.20 P3.5 R1.1 U4.5 | length 1128.4
  Top Layer w8: v1(469,3014) 471,3012 521.36,3012 531.66,3022.31 594.73,3022.31 626.04,2991 R1.1@673.28,2991 ; R1.1 R1.1@670.87,2980.72
  Signal_Layer w8: v1(469,3014) 456,3001 456,2864 484,2836 521.73,2836 554.5,2868.77 554.5,2892.5 573,2911 608,2911 619,2900 v1(619,2884) 613.5,2878.5 613.5,2851.4 588,2825.9 588,2678 P3.5@729.5,2536.5
  Bottom Layer w8: v1@469,3015 v1@469.5,3014.5 ; v1@470,3014 475,3009 U4.5 U4.5@511,3009 ; v1(619,2884) 618,2884 619,2883 MCU1.20@656.06,2883
SV_OUT: U4.2 U5.1 | length 336.1
  Bottom Layer w8: U4.2@536.8,3009 U4.2 568,3009 596,3037 596,3125 557,3164 557,3180.53 600.24,3223.77 600.24,3246.87 U5.1@585.11,3262
SVSOUT: MCU1.51 P1.3 | length 145.9
  Bottom Layer w8: MCU1.51 1130.73,3080.27 1142,3091.54 1142,3130 P1.3
TCK: MCU1.57 P1.9 | length 168.3
  Bottom Layer w8: MCU1.57 1122.84,2962.16 1140,2945 1140,2875 1149,2866 P1.9@1179,2866
TDI: MCU1.55 P1.5 | length 134.5
  Bottom Layer w8: MCU1.55 1124.53,3001.53 1143,3020 1143,3054 1156,3067 P1.5
TDO: MCU1.54 P1.8 | length 142.1
  Top Layer w8: v1(1114,3021) 1114,2963 1160,2917 P1.8
TEMP_PWR: C13.2 MCU1.12 TMP.4 | length 605.5
  Bottom Layer w8: C13.2@395.59,2921 395.59,2893.4 412.99,2876 430,2876 644,2662 772,2662 805,2695 MCU1.12@805,2754
TMS: MCU1.56 P1.6 | length 96.5
  Bottom Layer w10: MCU1.56 1136.84,2981.84 P1.6@1173,3018
TRANSMIT_RFID: MCU1.13 PP1.0 Q4.3 R3.2 | length 1021.2
  Top Layer w15: R3.2@174,2681 201,2681 PP1.0@202,2682
  Bottom Layer w8: 442,2889 649,2682 709,2682 ; 708,2682 767,2682 786,2701 MCU1.13@786,2730
  Bottom Layer w10: PP1.0@199,2681 230,2712 230,2817 252,2839 252,2935 280,2963 397,2963 442,2918 442,2889
TX_SIMO_A: MCU1.32 P2.5 | length 261.2
  Bottom Layer w8: MCU1.32@662,3119 662,3251 730,3319 P2.5@730,3352
VOUT: C1.2 DA1.1 ED.1 P3.2 R5.2 R19.1 Rs.1 U3.1 U3.4 U4.1 U5.3 U5.4 U6.4 | length 2460.9
  Top Layer w8: v2@236,3108 v2(237,3108) 347,3108 375,3136 ED.1
  Top Layer w10: R19.1@692,2751 669,2728 669,2678 U6.4@703.5,2643.5
  Top Layer w15: ED.1 388.41,3258.41 432.4,3302.4 C1.2 ; C1.2@439,3314 484,3314 494,3304 494,3187 632,3187 648,3171 648,3149 DA1.1@674.54,3149 ; R5.2@494,3148 v2@494,3184
  Signal_Layer w10: v2@236,3108 236,2995 447,2784 v2(447,2610)
  Bottom Layer w8: U4.1@536.8,3024.75 553.75,3024.75 557,3028
  Bottom Layer w10: U3.1 446.09,2610.91 467,2590 750,2590 762,2602 762,2636 756,2642 v2(704,2642) ; U3.1@446.49,2700 U3.4@446.49,2774 ; v2(494,3177) 517,3177 ; U5.4@513,3259 513,3181 517,3177 ; 557,3028 557,3037 577,3057 577,3117 517,3177 ; P3.2 579,2589
VREG: C14.2 C20.1 MCU1.1 MCU1.64 P1.10 P3.13 R6.1 R10.1 R11.1 U2.6 U3.3 U4.6 U7.8 | length 3397.1
  Top Layer w12: v2@551.41,3210 551.41,3236 R10.1@551.41,3296 ; 826,2872 826,2846 888,2784 888,2714 v4(908,2694) ; C20.1 v3(1062,2738)
  Top Layer w15: v2(357,2778) 357,2629 411,2575 1129,2575 ; R6.1@1027,2795 1129,2795 ; C20.1@1028,2737 U7.8@1028,2883 ; P3.13@1129,2532.81 1129,2575 ; P1.10@1183.5,2817.5 1179,2822 1129,2822 1129,2575
  Signal_Layer w12: v2(357,2778) 213,2922 213,3198 291,3276 487,3276 v2@552,3211 ; v2(551,3111) v2@551,3208 ; v4(908,2694) 908.48,2694.49 913.5,2689.5 978.5,2689.5 1027,2738 v3(1062,2738)
  Bottom Layer w8: U4.6@512,3028 512,3038 518,3044 533,3044 554,3065 v2@554,3111
  Bottom Layer w15: C14.2 345.59,2766.59 v2(357,2778) U3.3@391.31,2778 ; 1027,2776 1057,2776 1069,2788 1069,2821 1070,2822 1129,2822 P1.10@1181,2822
  other v2: 551,3212
VSENSE: R17.1 R19.2 U6.1 | length 183.1
  Top Layer w10: U6.1@628,2701 628,2745 688.59,2805.59 R17.1@742,2805.59
VSENSE_ENABLE: MCU1.39 Q5.1 U6.5 | length 984.8
  Top Layer w8: 784,2668 920,2668 950,2698 950,2718.36 928.69,2739.66 928.69,2772.31 863.45,2837.55 863.13,2837.55 854,2846.69 854,3224 v1(846,3232)
  Top Layer w10: U6.5@699.5,2693.5 724,2669 789,2669 831,2711 Q5.1@831,2738
  Bottom Layer w8: MCU1.39 844.47,3230.47 v1(846,3232)
XIN: MCU1.8 Y1.2 | length 144.7
  Bottom Layer w8: MCU1.8 883.84,2650.16 896,2638 Y1.2@919.21,2638
XLPWR: C9.2 MCU1.16 XL.13 XL.14 XL.15 XL.16 | length 900.6
  Signal_Layer w8: v2(265,3159) 381,3043 478,3043 519,3002 560,3002 583,3002 v1(590,2995)
  Bottom Layer w8: v1@589.5,2994.5 561,2966 561,2804 610.52,2754.48 MCU1.16
  Bottom Layer w10: C9.2 262.54,3144.41 XL.15@264.13,3146 ; XL.13 XL.14 XL.15 XL.16
XLX: C6.1 MCU1.61 XL.12 | length 927.4
  Signal_Layer w8: v1@489,2933 1001,2933 1056,2878 1066,2878 v1@1072,2884 ; v1(1071,2883) v1@1071.5,2882.5
  Bottom Layer w8: XL.12 295.63,3057.22 C6.1 299.41,2981 411,2981 461,2931 v1@489,2931
  other v1: 489,2932
XLY: C5.2 MCU1.60 XL.10 | length 813
  Signal_Layer w8: v1@489,2953 1014.01,2953 1063.51,2903.5 1085.5,2903.5 v1@1086,2903
  Bottom Layer w8: XL.10 348.78,3036.63 C5.2 389.41,2996 426,2996 468,2954 v1(488,2954) v1@489,2954
  other v1: 1087,2903
XLZ: C4.2 MCU1.59 XL.8 | length 779.3
  Signal_Layer w8: v1@502,2975 503,2974 1022,2974 v1(1072,2924)
  Bottom Layer w8: XL.8 448.78,3091.63 C4.2 451.59,3090.41 451,3089.82 451,3006 483,2974 v1@499,2974
  other v1: 502,2974
XOUT: MCU1.9 Y1.1 | length 153.3
  Bottom Layer w8: Y1.1@820.79,2638 853,2638 864.16,2649.16 MCU1.9
pads on no net: MCU1.7 MCU1.23 MCU1.24 MCU1.25 MCU1.26 MCU1.27 MCU1.50 MCU1.52 XL.4 XL.9

## Polygon pours and split planes (outlines as drawn)
GND on GND_Plane "GND_Plane_Pour" (solid, remove dead copper, pour order 1001): 159,3366 159,2517 1194,2517 1194,3366
no net on Mechanical 1 "Bottom Layer-No Net" (hatched 45Degree grid 20 track 2, pour order 1000): 470,2649 195,2649 195,3362 469,3362 470,3360.4

## Keep-outs
Keep-Out Layer:
  lines w5: 100,3449 163,3386 ; 100,3449 163,3386 ; 100,3449 100,5810 0,5810 0,0 100,0 100,2434 163,2497 1229,2497 1229,3386 163,3386

## Other copper
Top Layer:
  region net ANT: 68.82,2799.29 99.54,2830 69.54,2860 38.82,2829.29
  rectangle net ANT: 29.85,18.24 69.22,2850
  region net GND: 69.22,5781.76 29.85,5781.76 29.85,2950 69.22,2950
  region net GND: 68.82,2939.29 99.54,2970 69.54,3000 38.82,2969.29
GND_Plane:
  rectangle net GND: 159,2734 212.09,2786.55
  region net GND: 205,2828 342,2965 204,3103 67,2966

## Silkscreen, mask and mechanical layers (free items; w line width, h text height)
Top Overlay:
  text "University Of" at 128,3023 h20 r90
  text "Massachusetts" at 160,3021 h20 r90
  text "Amherst" at 193,3021 h20 r90
  text "SPQR Lab" at 124,2589 h35
  text "Moo 1.1" at 124,2531 h35
Bottom Overlay:
  lines w3.15: 30.32,25.98 69.68,25.98 ; 30.32,65.35 69.68,65.35 ; 30.32,104.72 69.68,104.72 ; 30.32,144.09 69.68,144.09 ; 30.32,183.46 69.68,183.46 ; 30.32,222.83 69.68,222.83 ; 30.32,262.2 69.68,262.2 ; 30.32,5537.8 69.68,5537.8 ; 30.32,5577.17 69.68,5577.17 ; 30.32,5616.54 69.68,5616.54 ; 30.32,5655.91 69.68,5655.91 ; 30.32,5695.28 69.68,5695.28 ; 30.32,5734.65 69.68,5734.65 ; 30.32,5774.02 69.68,5774.02 ; 40.16,45.67 59.84,45.67 ; 40.16,85.04 59.84,85.04 ; 40.16,124.41 59.84,124.41 ; 40.16,163.78 59.84,163.78 ; 40.16,203.15 59.84,203.15 ; 40.16,242.52 59.84,242.52 ; 40.16,281.89 59.84,281.89 ; 40.16,5518.11 59.84,5518.11 ; 40.16,5557.48 59.84,5557.48 ; 40.16,5596.85 59.84,5596.85 ; 40.16,5636.22 59.84,5636.22 ; 40.16,5675.59 59.84,5675.59 ; 40.16,5714.96 59.84,5714.96 ; 40.16,5754.33 59.84,5754.33
  lines w5: 195,2517 195,3360 ; 470,2512 470,3361
  text "University Of" at 104,3313 h20 r90
  text "Massachusetts" at 138,3313 h20 r90
  text "Amherst" at 175,3313 h20 r90
  text "SPQR Lab" at 127,2785 h35 r90
  text "Moo 1.1" at 180,2737 h35 r90
Mechanical 1:
  lines w5: 195,3360 195,2647 470,2647 470,3362